# Altium PCB pm.PcbDoc
Units mil, origin at the board's own origin, x right, y up, seen from the top; angles counter-clockwise.
Board outline 629.92 x 1062.99 mil, 2 copper layers (Top Layer, Bottom Layer), stack 12.8 mil thick; 42 components, 18 nets, 108 pads, 36 vias.
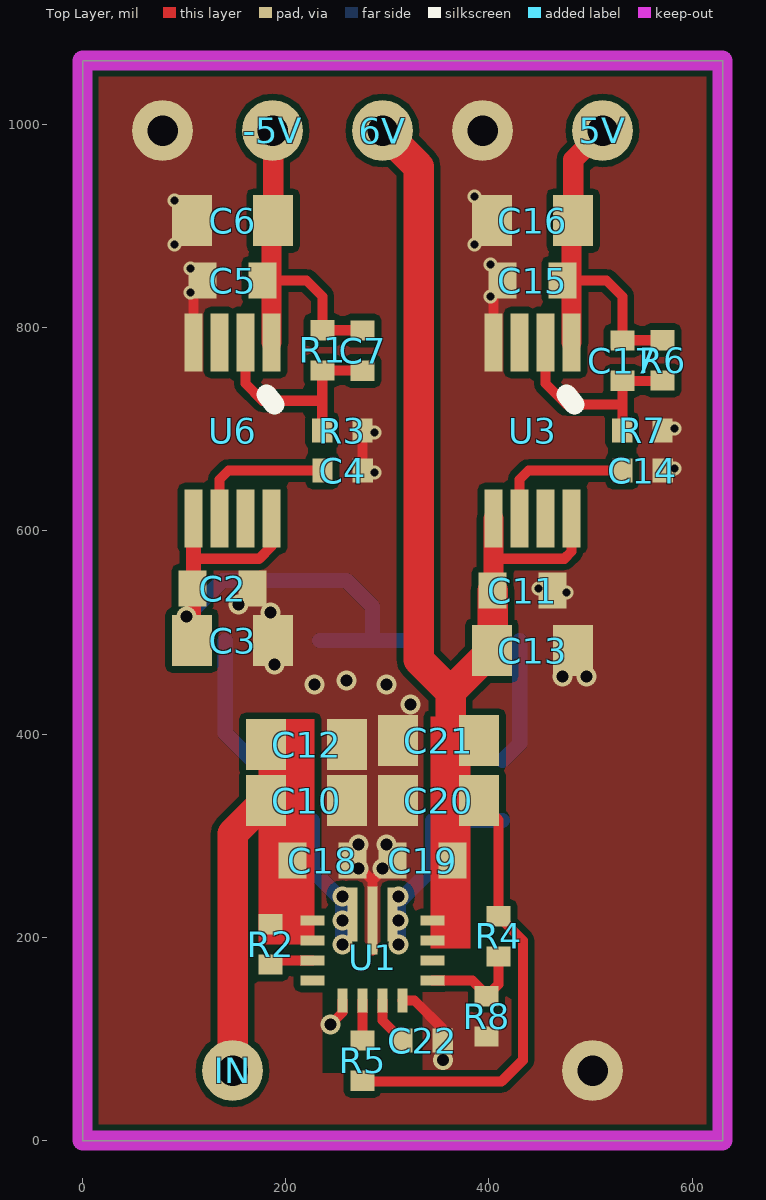
[diagram p0: Top Layer view]
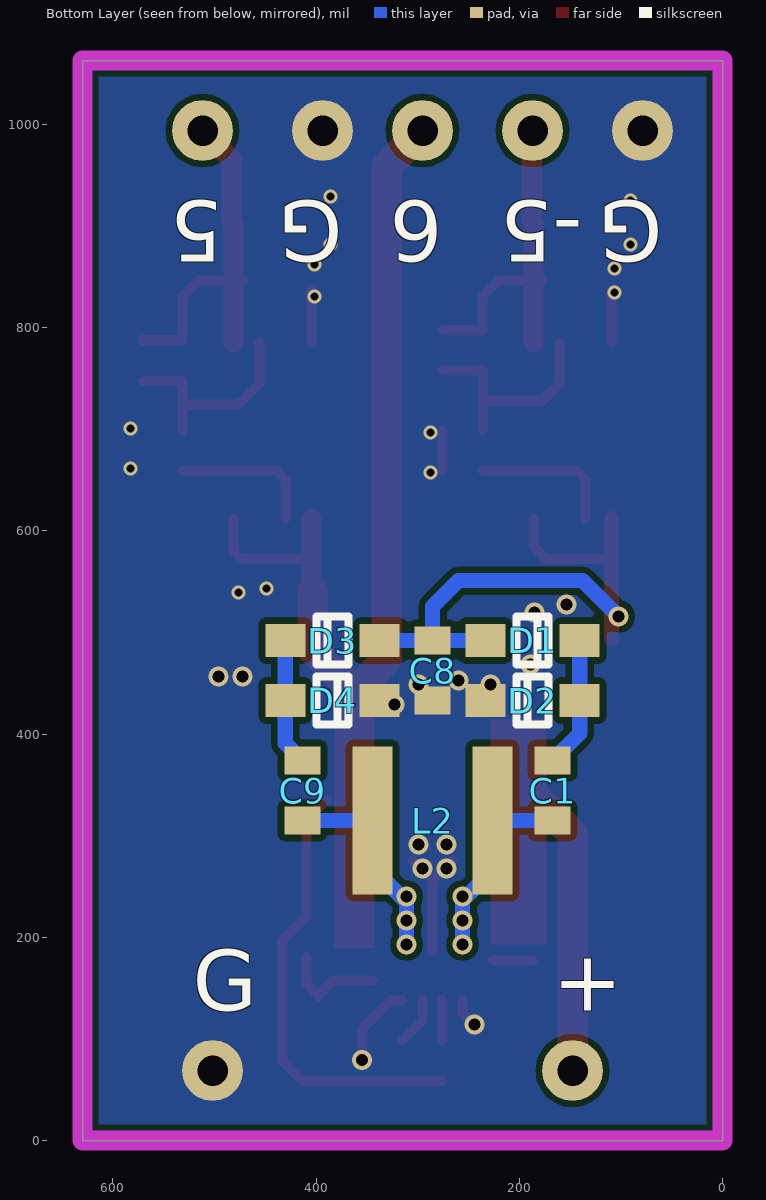
[diagram p1: Bottom Layer view, seen from below]
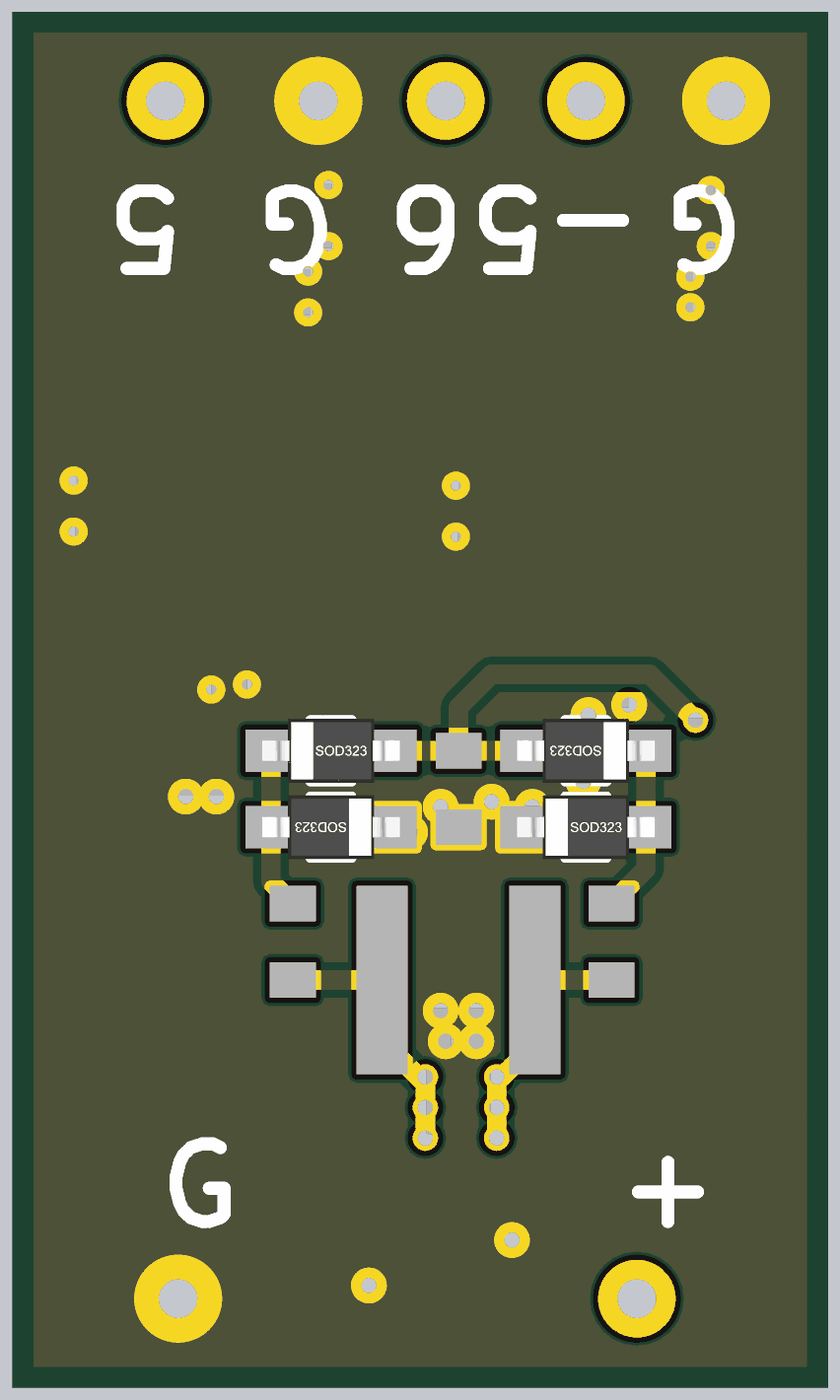
[diagram p2: 3D render of the assembled board from below, using the file's embedded part models]

## Layer stack, top to bottom
Top Solder: solder mask 0.4, Solder Resist, Dk 3.8
Top Layer: signal copper 1.4
Dielectric 1: core 10, Dk 4.2
Bottom Layer: signal copper 1.4
Bottom Solder: solder mask 0.4, Solder Resist, Dk 3.8

## Board outline
0,0 0,1062.99 629.92,1062.99 629.92,0

## Design rules (kind name [scope] priority, off if disabled: settings)
Clearance [All] p1: gap=6 ignorepadtopadclearanceinfootprint=FALSE except(0: Arc-Hole Track-Hole SMDPad-Hole THPad-Hole Via-Hole Fill-Hole Poly-Hole Region-Hole Text-Hole)
DiffPairsRouting [All] p1: maxlimit=10 minlimit=10 mostfreqgap=10 toplayer_minwidth=5.98 toplayer_maxwidth=15 toplayer_prefwidth=15 bottomlayer_minwidth=5.98 bottomlayer_maxwidth=15 bottomlayer_prefwidth=15 maxuncoupledlength=500
MinimumSolderMaskSliver [All] p1 off: minsoldermaskwidth=10
PlaneClearance [All] p1: clearance=10
PlaneConnect [All] p1: planeconnectstyle=Direct reliefexpansion=20 reliefentries=4 reliefconductorwidth=10 reliefairgap=10
PolygonConnect [All] p1: connectstyle=Direct reliefconductorwidth=10 reliefentries=4 polygonreliefangle="90 Angle" airgapwidth=10
RoomDefinition power [InComponentClass('power')] p1 off: confinementstyle=ConfineIn formatcopy=TRUE lockcomponents=FALSE outline 1697.28,-45.2 4042.28,-45.2 4042.28,194.8 1697.28,194.8
RoutingVias [All] p1: holewidth=12 width=20 viastyle="Through Hole" minholewidth=11.81 minwidth=19.68 maxholewidth=28 maxwidth=50
SilkToBoardRegionClearance [All] p1 off:
SilkToSilkClearance [All] p1 off: silktosilkclearance=10
SilkToSolderMaskClearance [IsPad] p1 off: minsilkscreentomaskgap=10 clearancetoexposedcopper=TRUE
SolderMaskExpansion [All] p1: expansion=4
Width [All] p1: maxlimit=60 minlimit=6 preferedwidth=6
23 further rules are at their usual default settings.

## Components (designator, comment, footprint, x,y, rotation, side; value= is the part's Value field where it differs from the comment)
5V "TestPad" TestPad 511.81,994.09 r90 top
6V "TestPad" TestPad 295.28,994.09 r0 top
-5V "TestPad" TestPad 187.01,994.09 r180 top
C1 "1uF" 0603L 167.32,344.49 r270 bottom
C2 "0.1uF" 0603L 137.8,543.31 r0 top
C3 "10uF" 0805 147.64,492.13 r180 top
C4 "10nF" 0402 255.91,659.45 r0 top
C5 "0.1uF" 0603L 147.64,846.46 r180 top
C6 "10uF" 0805 147.64,905.51 r0 top
C7 "10nF" 0402 275.59,777.56 r270 top
C8 "0.1uF" 0603L 285.43,462.6 r270 bottom
C9 "1uF" 0603L 413.39,344.49 r270 bottom
C10 "10uF" 0805 220.47,334.65 r180 top
C11 "0.1uF" 0603L 433.07,541.34 r0 top
C12 "10uF" 0805 220.47,389.76 r180 top
C13 "10uF" 0805 442.91,482.28 r180 top
C14 "10nF" 0402 551.18,659.45 r0 top
C15 "0.1uF" 0603L 442.91,846.46 r180 top
C16 "10uF" 0805 442.91,905.51 r0 top
C17 "10nF" 0402 531.5,767.72 r270 top
C18 "0.1uF" 0603L 236.22,275.59 r180 top
C19 "0.1uF" 0603L 334.65,275.59 r0 top
C20 "10uF" 0805 350.39,334.65 r0 top
C21 "10uF" 0805 350.39,393.7 r0 top
C22 "0.1uF" 0402 334.65,98.43 r0 top
D1 "Diode 1N4148" LC-SOD-323 187.01,492.13 r0 bottom
D2 "Diode 1N4148" LC-SOD-323 187.01,433.07 r180 bottom
D3 "Diode 1N4148" LC-SOD-323 383.86,492.13 r180 bottom
D4 "Diode 1N4148" LC-SOD-323 383.86,433.07 r0 bottom
IN "TestPad" TestPad 147.64,68.9 r0 top
L2 "1.5uH" L4015 226.38,314.96 r0 bottom
R1 "17k" 0402 236.22,777.56 r90 top
R2 "10k" 0402 185.04,192.91 r90 top
R3 "10k" 0402 255.91,698.82 r180 top
R4 "17k" 0402 409.45,200.79 r90 top
R5 "10k" 0402 275.59,78.74 r270 top
R6 "17k" 0402 570.87,767.72 r90 top
R7 "10k" 0402 551.18,698.82 r180 top
R8 "10k" 0402 397.64,122.05 r90 top
U1 "tps63070" TPS63070 285.43,187.01 r90 top
U3 "tps7a4901" MSOP8/VSSOP8 442.91,698.82 r270 top
U6 "tps7a3001" MSOP8/VSSOP8 147.64,698.82 r270 top

## Footprints (in the part's own frame and the unit in brackets; to place one, negate y for a bottom-side part, rotate by r counter-clockwise, add the part's x,y. Pads: shape width x height; smd on the part's side, far side on the other; paste and mask are expansions set on the pad)
0402 [mil] "0402-RES"
  rect 20x24 smd: 1(-19.68,0) 2(20,0)
0603L [mm]
  rect 0.7x0.9 smd: 1(-0.75,0) 2(0.75,0)
  body extent -0.8,-0.4 0.8,0.4, height 0.8
0805 [mil]
  rect 39.37x50 smd: 1(-40,0) 2(40,0)
  body extent -50,-30 50,30, height 31
L4015 [mm]
  rect 1x3.7 smd: 1(0,0) 2(3,0)
LC-SOD-323 [mm]
  rect 1x0.83 smd: 1(1.18,0) 2(-1.18,0)
  silkscreen extent -0.4,-0.6 0.4,0.6, body extent -1.35,-0.62 1.35,0.63, height 1.1
MSOP8/VSSOP8 [mm]
  rect 1.45x0.45 smd: 1(-2.2,0.975) 2(-2.2,0.325) 3(-2.2,-0.325) 4(-2.2,-0.975) 5(2.2,-0.975) 6(2.2,-0.325) 7(2.2,0.325) 8(2.2,0.975)
  silkscreen extent -0.9,0.85 -0.65,1.05
TestPad [mil]
  round 60 hole 30: 1(0,0)
TPS63070 [mm]
  rect 0.6x0.25 smd: 1(-1.25,0.75) 2(-1.25,0.25) 3(-1.25,-0.25) 4(-1.25,-0.75)
  rect 0.25x0.6 smd: 5(-0.75,-1.5) 6(-0.25,-1.5) 7(0.25,-1.5) 8(0.75,-1.5) 12(0.75,1.5) 13(0.25,1.5) 14(-0.25,1.5) 15(-0.75,1.5)
  rect 1.35x0.25 smd: 9(0.9,-0.5) 11(0.9,0.5)
  rect 1.7x0.25 smd: 10(0.75,0)
  body extent -1.25,-1.5 1.25,1.5, height 1

## Part data
C1 C2 C3 C4 C5 C6 C7 C8 C9 C10 C11 C12 C13 C14 C15 C16 C17 C18 C19 C20 C21 C22: library part Cap, "Capacitor", LatestRevisionDate=17-Jul-2002, LatestRevisionNote="Re-released for DXP Platform.", PackageDescription="Radial Cap, Thru-Hole; 2 Leads; 0.3 in Pin Spacing", PackageReference=RAD-0.3, Published=8-Jun-2000, Publisher="Altium Limited"
D1 D2 D3 D4: "High Conductance Fast Diode", Code_JEDEC=DO-204-AH, ComponentLink1Description="Manufacturer Link", ComponentLink1URL=http://www.fairchildsemi.com/, ComponentLink2Description=Datasheet, ComponentLink2URL=http://www.fairchildsemi.com/ds/1N%2F1N4148.pdf, DatasheetVersion=1997, LatestRevisionDate=17-Jul-2002, LatestRevisionNote="Re-released for DXP Platform.", PackageDescription="Diode, Axial; Body 3.8 x 1.9 mm (LxDia. max), Lead Dia. 0.53 mm (max)", PackageReference=DO-35, Published=8-Jun-2000, Publisher="Altium Limited"
L2: library part "Inductor Iron Dot", "Magnetic-Core Inductor with Winding Polarity Marking", LatestRevisionDate=17-Jul-2002, LatestRevisionNote="Re-released for DXP Platform.", PackageDescription="Diode; 2 Leads", PackageReference=DIODE_SMC, Published=24-Mar-1999, Publisher="Altium Limited"
R1 R2 R3 R4 R5 R6 R7 R8: library part Res2, "Resistor", LatestRevisionDate=17-Jul-2002, LatestRevisionNote="Re-released for DXP Platform.", PackageDescription="Axial Device, Thru-Hole; 2 Leads; 0.4 in Pin Spacing", PackageReference=AXIAL-0.4, Published=8-Jun-2000, Publisher="Altium Limited"
U3: library part tps7a3001

## Free pads (board coordinates)
  round 60 hole 30: 1(78.74,994.09) 1(393.7,994.09) 1(501.97,68.9)

## Via types
v1: diameter 19.68, hole 11.81, Top Layer to Bottom Layer, 22 vias
v2: diameter 13.78, hole 7.87, Top Layer to Bottom Layer, 14 vias

## Nets (pads, with @x,y where several pads share a name; then routed paths per layer and width w, separated by ;. In a path a pad name is that pad's centre, name@x,y a point inside that pad or via, vN(x,y) a via of type N, cw(c..) or ccw(c..) an arc to the next point about the centre after c; other vN are vias at no path point)
5V: 5V.1 C15.1 C16.2 C17.1 R6.2 U3.1 | length 367.4
  Top Layer w10: C15.1 481.3,846.46 515.75,846.46 531.5,830.71 C17.1 531.81,787.72 R6.2
  Top Layer w20: U3.1 481.3,846.46 C16.2@481.3,903.9 ; C16.2 482.91,965.2 5V.1
6V: 6V.1 C11.1 C13.2 C19.2 C20.2 C21.2 R4.2 R5.2 U1.7 U1.8 U3.5 U3.8 | length 1486.9
  Top Layer w10: R5.2 276.12,58.21 412.54,58.21 433.39,79.06 433.39,196.85 R4.2 409.45,315.59 C20.2 ; 404.53,574.8 406.67,572.66 474.24,572.66 481.3,579.72 U3.8
  Top Layer w20: C11.1@404.53,542.32 404.53,574.8 U3.5
  Top Layer w30: 6V.1 330.71,958.66 330.71,473.07 362.2,441.57 ; C19.2 362.2,277.56 362.2,441.57 ; C11.1 403.54,482.91 C13.2 362.2,441.57
-5V: -5V.1 C5.1 C6.2 C7.1 R1.2 U6.1 | length 346.5
  Top Layer w10: C5.1 186.02,846.46 220.47,846.46 236.22,830.71 R1.2 C7.1@275.28,797.56
  Top Layer w20: U6.1 186.02,846.46 186.02,903.9 C6.2 -5V.1@187.64,993.46
GND: C2.2 C3.1 C4.2 C5.2 C6.1 C8.2 C10.1 C11.2 C12.1 C13.1 C14.2 C15.2 C16.1 C18.1 C19.1 C20.1 C21.1 C22.2 D2.2 D4.2 pad.1 R3.1 R7.1 R8.1 U1.1 U1.4 U1.10 U3.4 U6.4 | length 378.6
  Top Layer w10: U6.4 C5.2@109.25,837.6 ; v1(244.09,114.17) 255.91,125.98 U1.1 ; C18.1 285.43,255.91 ; C4.2@275.59,659.76 R3.1 ; U1.10@285.43,187.01 U1.10 285.43,255.91 ; C19.1 285.43,255.91 ; U1.4 326.77,137.8 354.65,109.92 C22.2 v1(354.65,79.06) ; U3.4 C15.2@404.53,837.6
  other v1: 271.65,267.72 295.28,267.72 271.65,291.34 299.21,291.34 322.83,429.13 228.35,448.82 299.21,448.82 259.84,452.76 472.44,456.69 496.06,456.69 188.98,468.5 185.04,519.68 153.54,527.56
  other v2: 476.38,539.37 448.82,543.31 287.4,657.48 582.68,661.42 287.4,696.85 582.68,700.79 401.57,830.71 106.3,834.65 106.3,858.27 401.57,862.2 90.55,881.89 385.83,881.89 90.55,925.2 385.83,929.13
NetC1_1: C1.1 D1.2 D2.1 | length 129.2
  Bottom Layer w15: D1.2 D2.1 140.55,400.79 C1.1
NetC2_1: C2.1 C3.2 C8.1 D1.1 D3.1 U6.5 U6.8 | length 574.3
  Top Layer w10: 109.25,574.8 111.39,572.66 173.85,572.66 186.02,584.84 U6.8
  Top Layer w15: C3.2@109.25,493.74 109.25,574.8 U6.5
  Bottom Layer w15: v1(102.36,515.75) 137.8,551.18 259.84,551.18 285.43,525.59 C8.1 ; D1.1 C8.1 ; D3.1 C8.1
NetC4_1: C4.1 U6.6 | length 143.4
  Top Layer w10: U6.6 134.84,650.59 143.7,659.45 C4.1
NetC7_2: C7.2 R1.1 R3.2 U6.2 | length 220.6
  Top Layer w10: U6.2 160.43,745.08 177.32,728.19 235.91,728.19 ; R3.2 235.91,728.19 ; R1.1@235.91,757.56 235.91,728.19 ; R1.1 C7.2@275.28,757.87
NetC9_1: C9.1 D3.2 D4.1 | length 125.1
  Bottom Layer w15: C9.1 430.32,390.94 D4.1 D3.2
NetC10_2: C10.2 C12.2 C18.2 IN.1 R2.2 U1.12 U1.13 | length 279.3
  Top Layer w30: IN.1 147.64,301.81 C10.2
NetC14_1: C14.1 U3.6 | length 143.4
  Top Layer w10: U3.6 430.12,650.59 438.98,659.45 C14.1
NetC17_2: C17.2 R6.1 R7.2 U3.2 | length 212.3
  Top Layer w10: U3.2 455.71,745.08 476.38,724.41 531.5,724.41 ; R7.2@531.5,699.13 531.5,724.41 ; R6.1@570.55,747.72 C17.2 531.5,724.41
NetC22_1: C22.1 U1.3 | length 47.5
  Top Layer w10: U1.3 295.28,118.11 C22.1
NetR2_1: R2.1 U1.14 | length 39.4
  Top Layer w10: R2.1@187.01,177.17 U1.14
NetR4_1: R4.1 R8.2 U1.5 | length 96.9
  Top Layer w10: U1.5 383.54,157.48 R8.2@393.39,147.64 ; R8.2 409.45,153.86 R4.1
NetR5_1: R5.1 U1.2 | length 39.4
  Top Layer w10: R5.1 U1.2
SW1: C1.2 L2.1 U1.11 | length 195.6
  Bottom Layer w15: C1.2 L2.1 226.38,265.75 251.97,240.16 v1(255.91,240.16) v1(255.91,216.54) v1(255.91,192.91)
SW2: C9.2 L2.2 U1.9 | length 212.7
  Bottom Layer w15: v1(311.02,192.91) v1(311.02,216.54) v1(311.02,240.16) 311.02,237.6 312.4,236.22 344.49,268.31 L2.2 C9.2
pads on no net: U1.6 U1.15 U3.3 U3.7 U6.3 U6.7

## Polygon pours and split planes (outlines as drawn)
GND on Bottom Layer "GND_L02_P040" (solid, remove dead copper, pour order 40): 0,0 629.92,0 629.92,1062.99 0,1062.99
GND on Top Layer "GND_L01_P042" (solid, remove dead copper, pour order 42): 0,1062.99 629.92,1062.99 629.92,0 0,0

## Keep-outs
Keep-Out Layer:
  the board outline again, w19.68

## Other copper
Top Layer:
  rectangle net 6V: 342.52,188.98 381.89,417.32
  rectangle net NetC10_2: 173.23,192.91 228.35,414.76
  pour cut-out: 236.22,192.91 330.71,192.91 334.65,188.98 334.65,66.93 236.22,66.93

## Silkscreen, mask and mechanical layers (free items; w line width, h text height)
Bottom Overlay:
  text "G" at 59.06,925.2 h60 r180
  text "-5" at 137.8,925.2 h60 r180
  text "6" at 275.59,925.2 h60 r180
  text "G" at 374.02,925.2 h60 r180
  text "5" at 492.13,925.2 h60 r180
  text "+" at 167.32,127.95 h60
  text "G" at 521.65,127.95 h60